# Altium PCB Battery Charger.PcbDoc
Units mil, origin at the board's own origin, x right, y up, seen from the top; angles counter-clockwise.
Board outline 6000 x 4000 mil, 4 copper layers (Top Layer, GND, Power Plane, Bottom Layer), stack 23.756 mil thick; 64 components, 24 nets, 160 pads, 52 vias.
Unrouted connection lines stored in the file: 2.
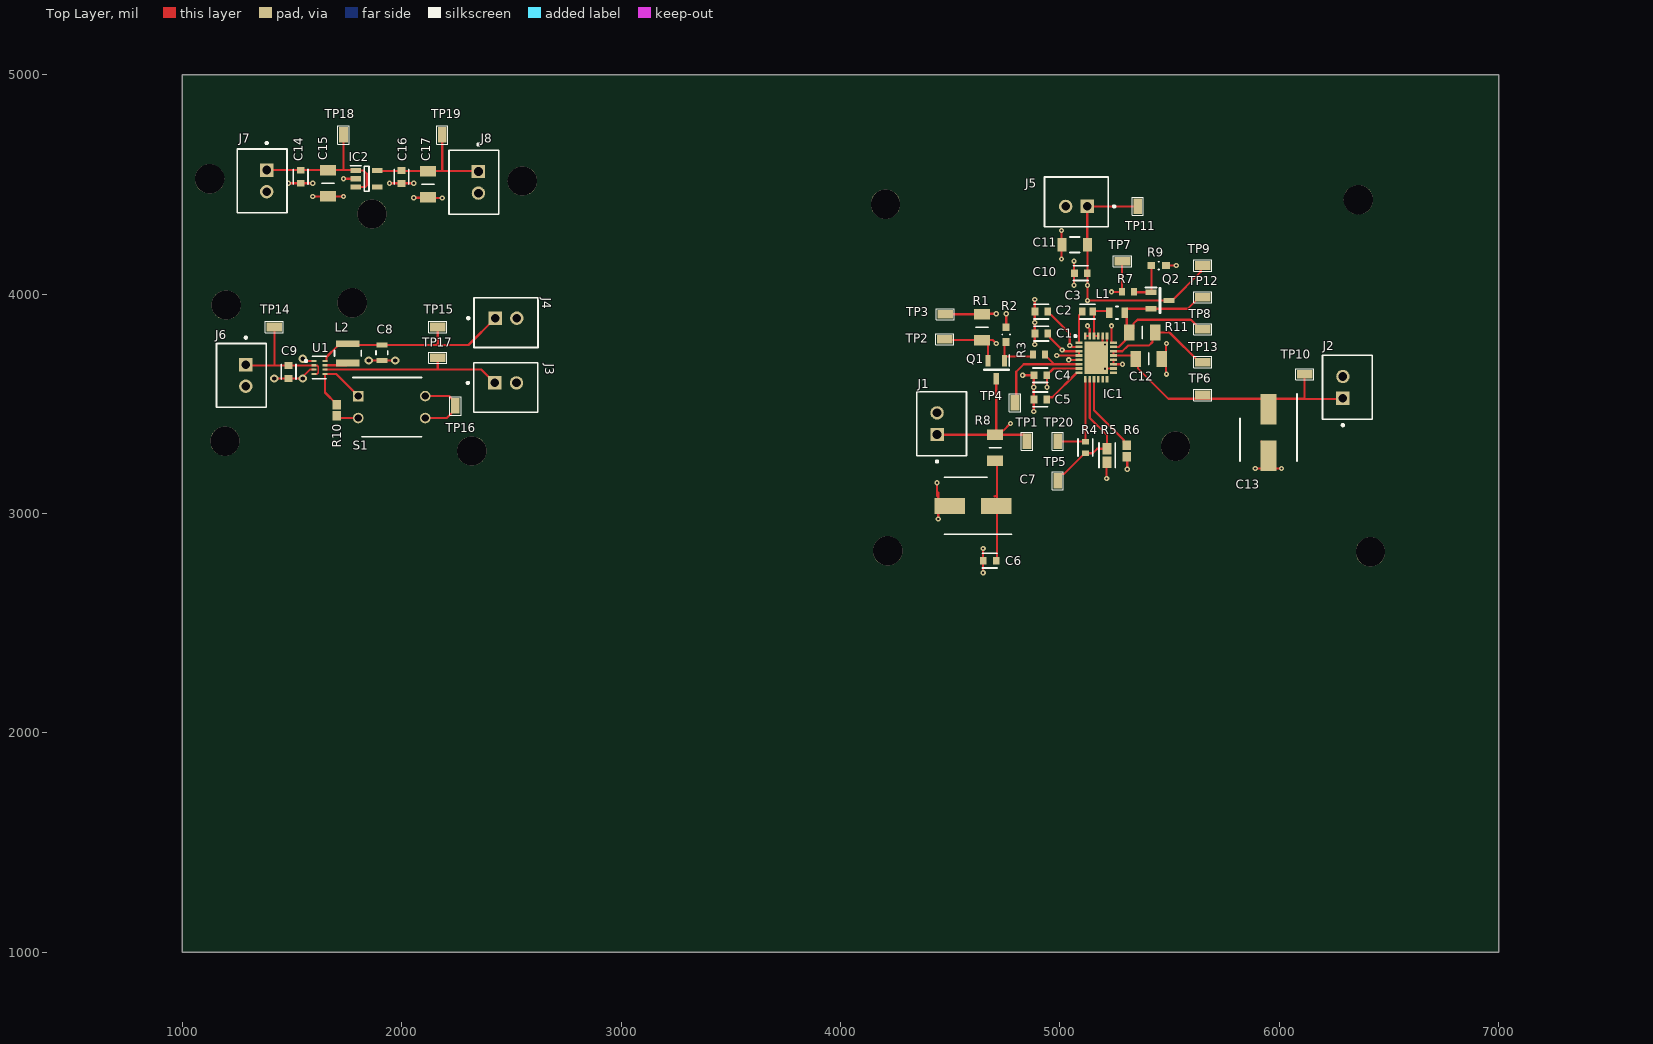
[diagram p0: Top Layer view]
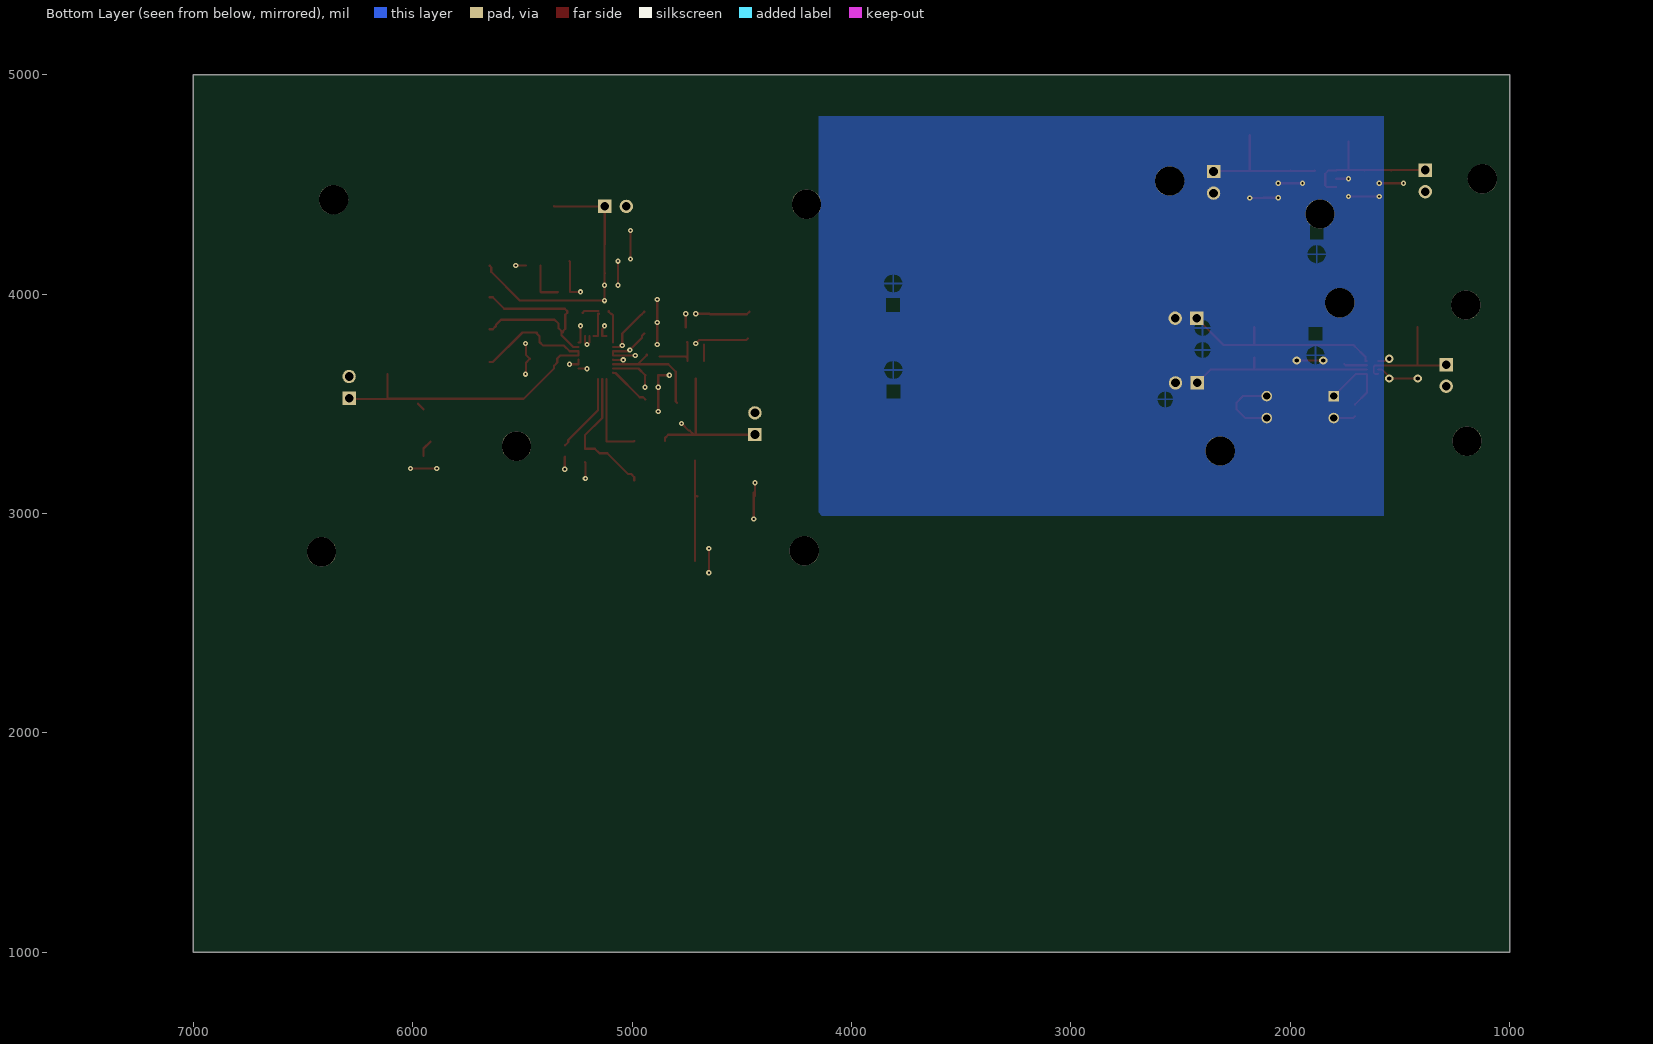
[diagram p1: Bottom Layer view, seen from below]
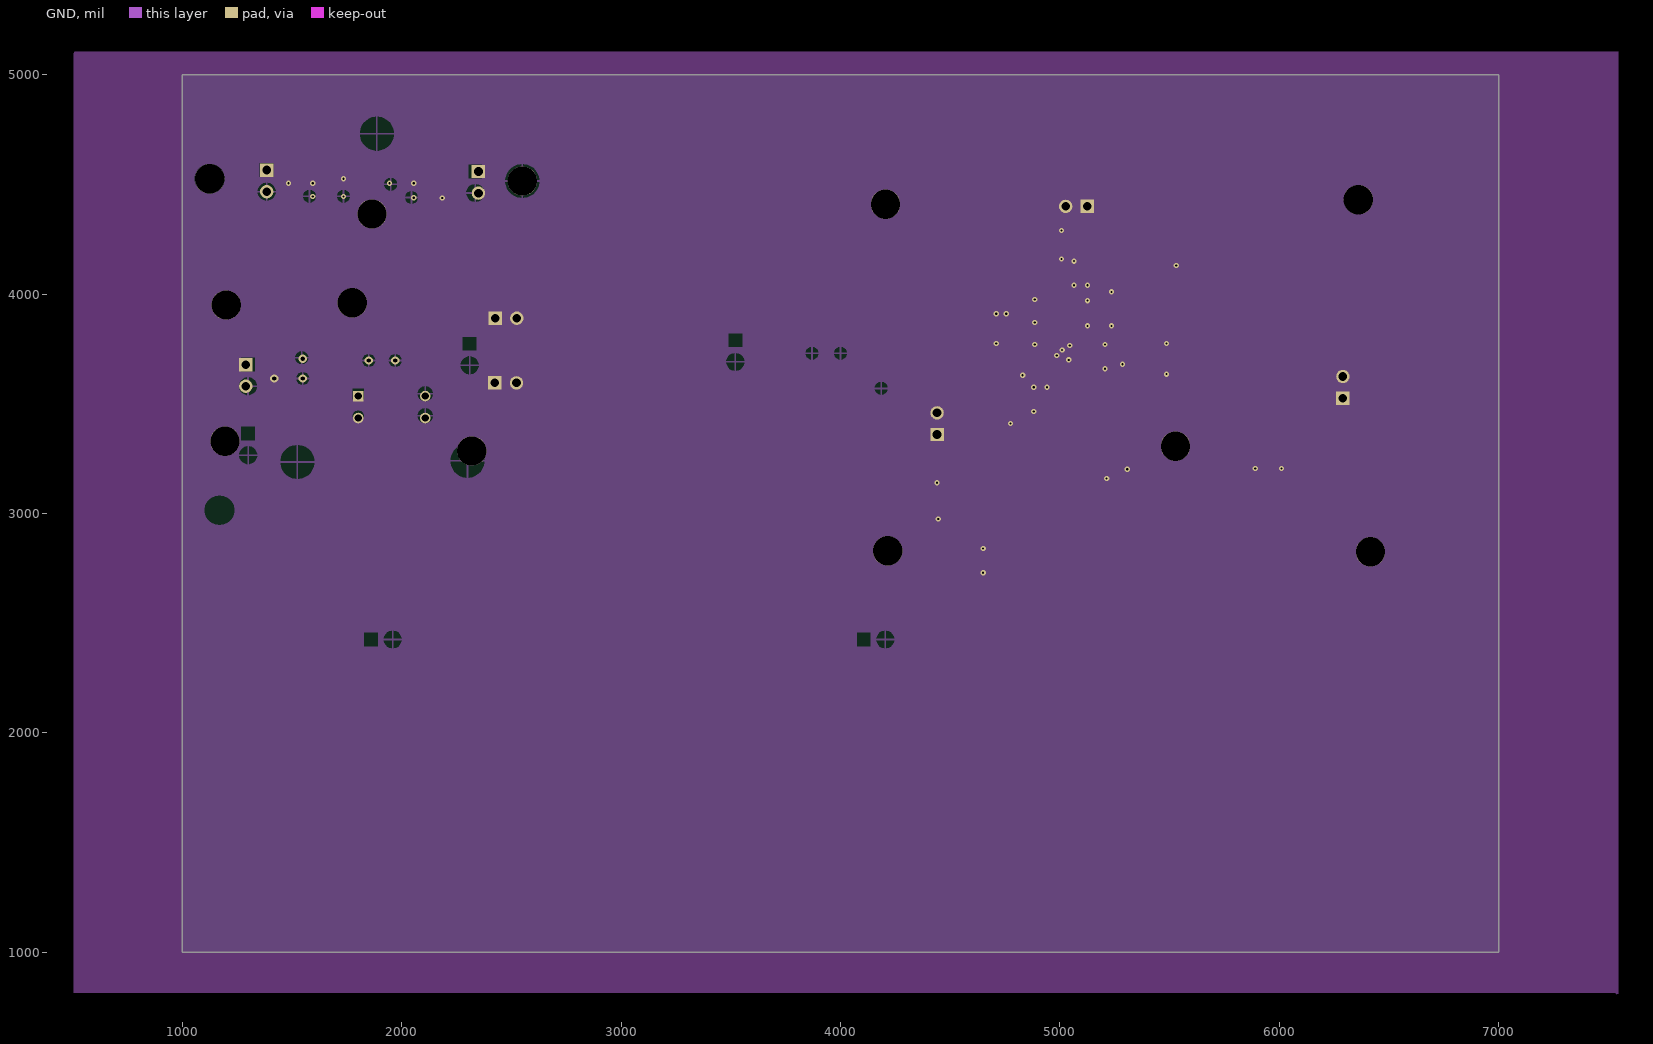
[diagram p2: GND]
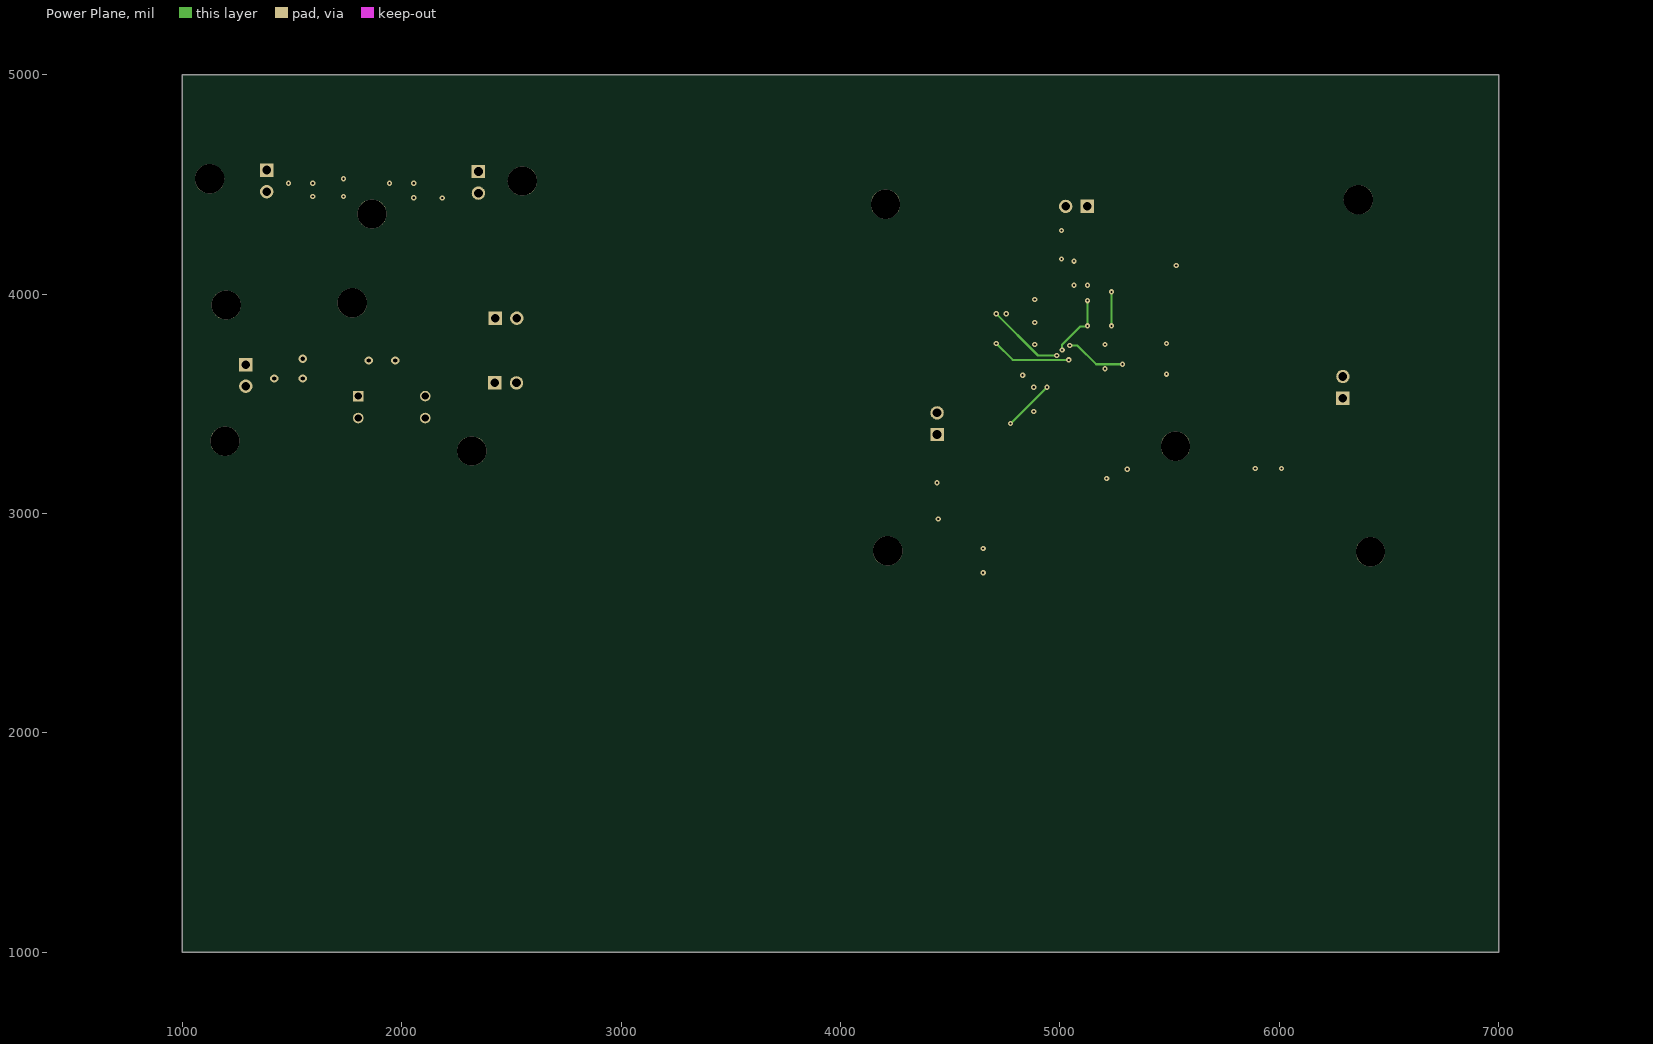
[diagram p3: Power Plane]
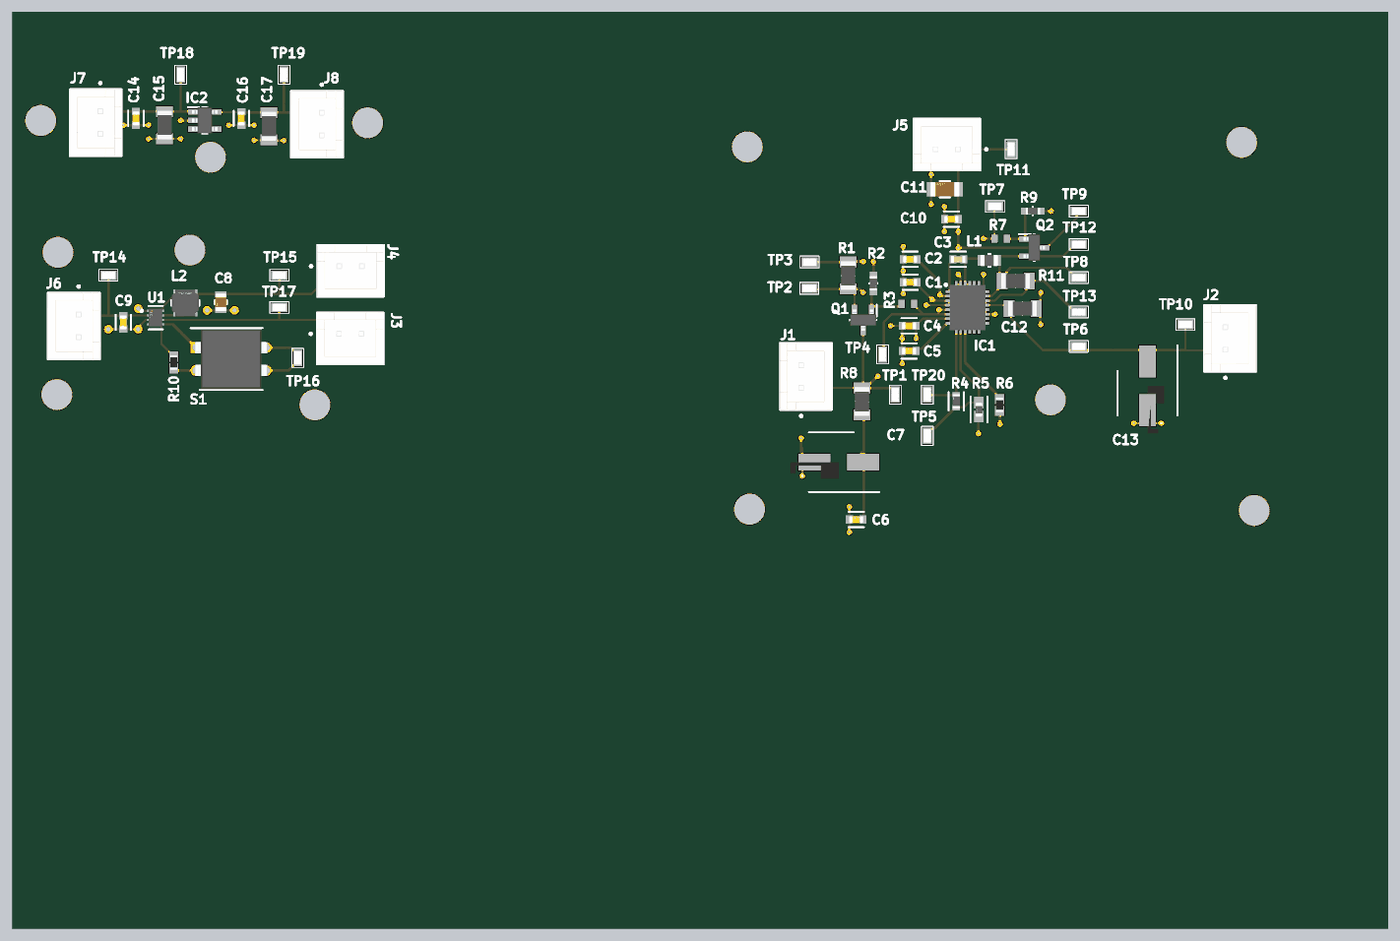
[diagram p4: 3D render of the assembled board from above, using the file's embedded part models]

## Layer stack, top to bottom
Top Solder: solder mask 0.4, Solder Resist, Dk 3.5
Top Layer: signal copper 1.4
Dielectric 2: prepreg 2.8, PP-006, Dk 4.1
GND: signal copper 1.378
Dielectric 1: dielectric 12.6, FR-4, Dk 4.8
Power Plane: signal copper 1.378
Dielectric 3: prepreg 2.8, PP-006, Dk 4.1
Bottom Layer: signal copper 1.4
Bottom Solder: solder mask 0.4, Solder Resist, Dk 3.5

## Board outline
1000,1000 7000,1000 7000,5000 1000,5000

## Design rules (kind name [scope] priority, off if disabled: settings)
Clearance [All] p1 off: gap=10 ignorepadtopadclearanceinfootprint=TRUE
PolygonConnect [All] p1: connectstyle=Relief reliefconductorwidth=10 reliefentries=4 polygonreliefangle="90 Angle" airgapwidth=10
RoutingVias [All] p1 off: holewidth=28 width=50 viastyle="Through Hole" minholewidth=28 minwidth=50 maxholewidth=28 maxwidth=50
SolderMaskExpansion [All] p1: expansion=4 istentingtop=FALSE
SupplyNets "Schematic Supply Nets" [InNet('GND')] p1: voltage=0.000
Width [All] p1: maxlimit=20 minlimit=9 preferedwidth=10 midlayer1_maxwidth=10 midlayer2_maxwidth=10 bottomlayer_maxwidth=10 minimp=50.000000 maximp=50.000000 favimp=50.000000
30 further rules are at their usual default settings.

## Classes and differential pairs
component class "Panel protection": C14 C15 C16 C17 IC2 J7 J8 TP18 TP19
component class "Step-Down Converter": C8 C9 J3 J4 J6 L2 R10 S1 TP14 TP15 TP16 TP17 U1
component class "Battery Charger": C1 C2 C3 C4 C5 C6 C7 C10 C11 C12 C13 IC1 J1 J2 J5 L1 Q1 Q2 R1 R2 R3 R4 R5 R6 R7 R8 R9 R11 TP1 TP2 TP3 TP4 TP5 TP6 TP7 TP8 TP9 TP10 TP11 TP12 TP13 TP20

## Components (designator, comment, footprint, x,y, rotation, side; value= is the part's Value field where it differs from the comment)
C1 "0.1µF" FP-CC0603-DA-MFG 4915,3820 r180 top value="100 nF"
C2 "4.7 µF" FP-CC0603-DA-MFG 4915,3920 r180 top value="4.7 uF"
C3 "0.022 µF" FP-C0603C-CF-MFG 5125,3920 r180 top value="22,000 pF"
C4 "0.1µF" FP-CC0603-DA-MFG 4910.47,3630 r180 top value="100 nF"
C5 "1µF" FP-CC0603-DA-MFG 4910.47,3520 r180 top value="1 uF"
C6 "0.1µF" FP-CC0603-DA-MFG 4680,2785 r180 top value="100 nF"
C7 "150µF" CAPAE660X730N 4603.7,3035 r180 top
C8 "10µF" FP-GRM21B-0_1-MFG 1910.27,3732.62 r270 top
C9 "4.7 µF" FP-CC0603-DA-MFG 1485,3645 r270 top value="4.7 uF"
C10 "0.1µF" FP-CC0603-DA-MFG 5095,4095 r180 top value="100 nF"
C11 "22uF" FP-GRM31C-0_2-e0_3_0_8-MFG 5066.93,4225 r180 top
C12 "10 µF" 1206 5405,3705 r0 top value="22,000 pF"
C13 "150µF" CAPAE660X730N 5950,3368.7 r270 top
C14 "0.33 µF" FP-CC0603-DA-MFG 1540,4534.53 r270 top value="330 nF"
C15 "10 µF" 1206 1665,4505 r270 top value="22,000 pF"
C16 "0.33 µF" FP-CC0603-DA-MFG 1999.45,4534.06 r270 top value="330 nF"
C17 "10 µF" 1206 2120,4500 r270 top value="22,000 pF"
IC1 "LTC4162EUFD-L42#PBF" QFN50P400X500X80-29N-D 5165,3710 r0 top
IC2 "MAX40200AUK+TCT" SOT95P280X145-5N 1840,4525 r0 top
J1 "B2B-XH-A(LF)(SN)" FP-B2B-XH-A_LF_SN-MFG 4460.67,3409.21 r90 top
J2 "B2B-XH-A(LF)(SN)" FP-B2B-XH-A_LF_SN-MFG 6310,3575 r90 top
J3 "B2B-XH-A(LF)(SN)" FP-B2B-XH-A_LF_SN-MFG 2474.21,3574.33 r0 top
J4 "B2B-XH-A(LF)(SN)" FP-B2B-XH-A_LF_SN-MFG 2475.79,3869.33 r0 top
J5 "B2B-XH-A(LF)(SN)" FP-B2B-XH-A_LF_SN-MFG 5075,4420 r180 top
J6 "B2B-XH-A(LF)(SN)" FP-B2B-XH-A_LF_SN-MFG 1269.33,3629.21 r270 top
J7 "B2B-XH-A(LF)(SN)" FP-B2B-XH-A_LF_SN-MFG 1364.33,4515.79 r270 top
J8 "B2B-XH-A(LF)(SN)" FP-B2B-XH-A_LF_SN-MFG 2329.33,4509.21 r270 top
L1 "MLZ2012M1R0HT000" FP-MLZ2012-1_25-MFG 5260,3915 r0 top
L2 "2.2uH" FP-NR3015-MFG 1755,3730 r90 top
Q1 "IRLML6344TRPBF" SOT95P237X112-3N 4710,3655 r270 top
Q2 "IRLML6344TRPBF" SOT95P237X112-3N 5456.01,3970.68 r0 top
R1 "60 mOhms" 1206 4645,3849.06 r90 top
R2 "100 kOhms" "RC0603FR-07100KL Resistor" 4755,3815 r270 top
R3 "10 Ohms" "RC0603FR-0710RL Resistor" 4905,3725 r180 top
R4 "10 kOhms" RC0603FR-0710KL 5115.79,3300.93 r90 top
R5 "10 kOhms" NCP18XH103F03RB 5215,3264.45 r270 top
R6 "63.4 kOhms" RESC1608X55N 5305,3285 r90 top
R7 "10 Ohms" "RC0603FR-0710RL Resistor" 5310,4010 r180 top
R8 "2.2 Ohms" 1206 4705,3300 r90 top
R9 "100 kOhms" "RC0603FR-07100KL Resistor" 5450,4130 r180 top
R10 "267kOhms" RESC1608X55N 1705,3470 r270 top
R11 "150 mOhms" 1206 5375,3825 r0 top
S1 "210-2MS" DIP775W63P254L655H458Q4N 1955,3485 r0 top
TP1 "S2761-46R" S276146R 4850,3330 r90 top
TP2 "S2761-46R" S276146R 4475.57,3793.52 r180 top
TP3 "S2761-46R" S276146R 4476.89,3908.11 r0 top
TP4 "S2761-46R" S276146R 4795,3505 r270 top
TP5 "S2761-46R" S276146R 4990,3150 r90 top
TP6 "S2761-46R" S276146R 5650,3540 r0 top
TP7 "S2761-46R" S276146R 5285,4150 r0 top
TP8 "S2761-46R" S276146R 5650,3840 r0 top
TP9 "S2761-46R" S276146R 5650,4130 r0 top
TP10 "S2761-46R" S276146R 6115,3635 r0 top
TP11 "S2761-46R" S276146R 5355,4400 r270 top
TP12 "S2761-46R" S276146R 5650,3985 r180 top
TP13 "S2761-46R" S276146R 5650,3690 r180 top
TP14 "S2761-46R" S276146R 1420,3850 r180 top
TP15 "S2761-46R" S276146R 2165,3850 r0 top
TP16 "S2761-46R" S276146R 2245,3490 r270 top
TP17 "S2761-46R" S276146R 2165,3710 r180 top
TP18 "S2761-46R" S276146R 1735,4725 r90 top
TP19 "S2761-46R" S276146R 2185,4725 r90 top
TP20 "S2761-46R" S276146R 4990,3330 r270 top
U1 "TPS62840DLCR" FP-DLC0008B-MFG 1625.59,3665.47 r0 top

## Footprints (in the part's own frame and the unit in brackets; to place one, negate y for a bottom-side part, rotate by r counter-clockwise, add the part's x,y. Pads: shape width x height; smd on the part's side, far side on the other; paste and mask are expansions set on the pad)
1206 [mm]
  rect 1.2x1.85 smd: 1(-1.5,0) 2(1.5,0)
  silkscreen extent 0,-0.7 0,0.7, body extent -1.6,-0.8 1.6,0.8, height 0.64
CAPAE660X730N [mm]
  rect 3.55x1.85 smd: 1(-2.7,0) 2(2.7,0)
  silkscreen extent -4.47,-3.3 3.3,3.3, body extent -0.35,-0.2 7.15,7.1
DIP775W63P254L655H458Q4N [mm]
  rect 1.23x1.23 hole 0.83: 1(-3.875,1.27)
  round 1.23 hole 0.83: 2(-3.875,-1.27) 3(3.875,-1.27) 4(3.875,1.27)
  silkscreen extent -4.49,-3.42 3.47,3.42, body extent -4.03,-3.27 4.03,3.27, height 4.58
FP-B2B-XH-A_LF_SN-MFG [mm]
  rect 1.55x1.55 hole 1 paste-2539.97 mask+0: 1(-1.25,0.525)
  round 1.55 hole 1 paste-2539.97 mask+0: 2(1.25,0.525)
  silkscreen extent -4.5,-2.88 3.7,2.88, body extent -3.8,-2.98 3.8,2.98, height 0.25
FP-C0603C-CF-MFG [mm]
  rect 0.75x0.9 smd paste+0 mask+0: 1(-0.6,0) 2(0.6,0)
  silkscreen extent -0.87,-0.85 0.88,0.85, body extent -1.2,-0.6 1.2,0.6, height 0.25
FP-CC0603-DA-MFG [mm]
  rect 0.8x0.9 smd paste+0 mask+0: 1(-0.75,0) 2(0.75,0)
  silkscreen extent -0.85,-0.85 0.85,0.85, body extent -1.35,-0.75 1.35,0.75, height 0.25
FP-DLC0008B-MFG [mm]
  rrect40% 0.6x0.25 smd paste+0 mask+0: 1(-0.65,0.75) 2(-0.65,0.25) 3(-0.65,-0.25) 4(-0.65,-0.75) 5(0.65,-0.75) 6(0.65,-0.25) 7(0.65,0.25) 8(0.65,0.75)
  silkscreen extent -1.67,-1.3 0.8,1.3, body extent -1.05,-1.15 1.05,1.15, height 0.25
FP-GRM21B-0_1-MFG [mm]
  rect 0.6x1.25 smd paste+0 mask+0: 1(-0.9,0) 2(0.9,0)
  silkscreen extent -0.23,-0.67 0.23,0.67, body extent -1.3,-0.77 1.3,0.77, height 0.25
FP-GRM31C-0_2-e0_3_0_8-MFG [mm]
  rect 1.05x1.6 smd paste+0 mask+0: 1(-1.475,0) 2(1.475,0)
  silkscreen extent -0.58,-0.9 0.58,0.9, body extent -2.1,-1 2.1,1, height 0.25
FP-MLZ2012-1_25-MFG [mm]
  rect 0.8x1.2 smd paste+0 mask+0: 1(-0.9,0) 2(0.9,0)
  silkscreen extent -0.13,-0.72 0.13,0.72, body extent -1.4,-0.82 1.4,0.82, height 0.25
FP-NR3015-MFG [mm]
  rect 0.8x2.7 smd paste+0 mask+0: 1(-1.1,0) 2(1.1,0)
  silkscreen extent -0.33,-1.55 0.33,1.55, body extent -1.65,-1.65 1.65,1.65, height 0.25
NCP18XH103F03RB [mil]
  rect 51.42x41.66 smd paste+0 mask+0: 1(-30.55,0) 2(30.55,0)
  silkscreen extent -56,-37 56,37, body extent -76,-41 76,41, height 10
QFN50P400X500X80-29N-D [mm]
  rect 0.8x0.3 smd: 1(-2,1.75) 2(-2,1.25) 3(-2,0.75) 4(-2,0.25) 5(-2,-0.25) 6(-2,-0.75) 7(-2,-1.25) 8(-2,-1.75) 15(2,-1.75) 16(2,-1.25) 17(2,-0.75) 18(2,-0.25) 19(2,0.25) 20(2,0.75) 21(2,1.25) 22(2,1.75)
  rect 0.3x0.8 smd: 9(-1.25,-2.5) 10(-0.75,-2.5) 11(-0.25,-2.5) 12(0.25,-2.5) 13(0.75,-2.5) 14(1.25,-2.5) 23(1.25,2.5) 24(0.75,2.5) 25(0.25,2.5) 26(-0.25,2.5) 27(-0.75,2.5) 28(-1.25,2.5)
  rect 2.75x3.75 smd: 29(0,0)
  silkscreen extent -2.52,2.38 -2.27,2.62, body extent -2.05,-2.55 2.05,2.55, height 0.8
RC0603FR-0710KL [mil]
  rect 25.93x31.97 smd paste+0 mask+0: 1(-26.64,0) 2(26.64,0)
  silkscreen extent -40,-33 40,33, body extent -44,-22 44,22, height 10
"RC0603FR-0710RL Resistor" [mm] "Chip Resistor, 2-Leads, Body 1.70x0.90mm, IPC Medium Density"
  rect 0.7x0.9 smd: 1(-0.7,0) 2(0.7,0)
  body extent -0.85,-0.45 0.85,0.45, height 0.55
"RC0603FR-07100KL Resistor" [mm]
  rect 0.9x0.8 smd paste+0 mask+0: 1(-0.85,0) 2(0.85,0)
  silkscreen extent -0.03,-0.45 0.03,0.45, body extent -1.4,-0.55 1.4,0.55, height 0.25
RESC1608X55N [mm]
  rect 1.1x1 smd: 1(-0.65,0) 2(0.65,0)
  body extent -0.8,-0.4 0.8,0.4, height 0.55
S276146R [mm]
  rect 1.8x1 smd: 1(0,0)
  silkscreen extent -1.05,-0.65 1.05,0.65, body extent -0.8,-0.4 0.8,0.4, height 1.18
SOT95P237X112-3N [mm]
  rect 1.3x0.6 smd: 1(-1.05,0.95) 2(-1.05,-0.95) 3(1.05,0)
  silkscreen extent -1.7,-1.46 0.05,1.5, body extent -1.18,-1.46 1.18,1.46, height 1.12
SOT95P280X145-5N [mm]
  rect 1.25x0.6 smd: 1(-1.25,0.95) 2(-1.25,0) 3(-1.25,-0.95) 4(1.25,-0.95) 5(1.25,0.95)
  silkscreen extent -1.88,-1.45 0.28,1.5, body extent -1.4,-1.45 1.4,1.45, height 1.45

## Part data
C1 C4 C6 C10: library part CMP-2000-05002-2, "CAP CER 0.1UF 16V X7R 0603 CC0603KRX7R7BB104", Capacitance="100 nF", Manufacturer=YAGEO, Manufacturer Part Number=CC0603KRX7R7BB104, Package=CC0603-DA, Temperature="-55°C to +125°C", Temperature Characteristic=X7R, Temperature Coefficient=15%, Temperature Range High=+125°C, Temperature Range Low=-55°C, Tolerance=0.1, Voltage="16 V", Automotive=No, Category=Cap, ComponentLink2Description=Datasheet, ComponentLink2URL=http://www.yageo.com/documents/recent/UPY-GPHC_X7R_6.3V-to-50V_18.pdf, Device Class L1="Passive Components", Device Class L2=Capacitors, Device Class L3="Ceramic Capacitors", Digikey Description="CAP CER 0.1UF 16V X7R 0603", Footprint Url=http://www.yageo.com/exep/pages/download/literatures/UPY-C_GEN_24.pdf, Height=0.9mm, Lead Free=Yes, Material=Ceramic, Mouser Description="Multilayer Ceramic Capacitor, CC Series, 0.1 - F, - 10%, X7R, 16 V, 0603 [1608 Metric]", Octopart=https://octopart.com/cc0603krx7r7bb104-yageo-192941, RoHS=TRUE, Voltage Rating="16 V"
C2 C9: library part CMP-2000-06074-2, "CAP CER 4.7UF 10V X5R 0603 CC0603KRX5R6BB475", Capacitance="4.7 uF", Manufacturer=YAGEO, Manufacturer Part Number=CC0603KRX5R6BB475, Package=CC0603-DA, Temperature="-55°C to +125°C", Temperature Characteristic=X5R, Temperature Coefficient=15%, Temperature Range High=+125°C, Temperature Range Low=-55°C, Tolerance=0.1, Voltage="10 V", Automotive=No, Category=Cap, ComponentLink2Description=Datasheet, ComponentLink2URL=http://www.yageo.com/documents/recent/UPY-GPHC_X7R_6.3V-to-50V_18.pdf, Device Class L1="Passive Components", Device Class L2=Capacitors, Device Class L3="Ceramic Capacitors", Digikey Description="CAP CER 4.7UF 10V X5R 0603", Footprint Url=http://www.yageo.com/exep/pages/download/literatures/UPY-C_GEN_24.pdf, Height=0.9mm, Lead Free=Yes, Material=Ceramic, Mouser Description="4.7µF Surface Mount, MLCC 0603 (1608 Metric) Package Ceramic Capacitors", Octopart=https://octopart.com/cc0603krx5r6bb475-yageo-9292507, RoHS=TRUE, Voltage Rating="10 V"
C3: library part CMP-2006-03139-2, "Ceramic Capacitor 0.022Uf 16V, X7R, 10%, 0603, Full Reel C0603C223K4RACTU", Capacitance="22,000 pF", Manufacturer=KEMET, Manufacturer Part Number=C0603C223K4RACTU, Package=C0603C-CF, Temperature="-55°C to +125°C", Temperature Characteristic=X7R, Temperature Coefficient=30ppm/°C, Temperature Range High=+125°C, Temperature Range Low=-55°C, Tolerance=0.1, Voltage Rating="16 V", Automotive=Yes, Automotive Grade="Grade 1", Category=Cap, ComponentLink2Description=Datasheet, ComponentLink2URL=https://api.kemet.com/component-edge/download/datasheet/C0603C100J5GACAUTO.pdf, Device Class L1="Passive Components", Device Class L2=Capacitors, Device Class L3="Ceramic Capacitors", Digikey Description="Ceramic Capacitor 0.022Uf 16V, X7R, 10%, 0603, Full Reel", Height=0.87mm, Lead Free=Yes, Material=Ceramic, Mouser Description="CAP CER 0.022UF 16V X7R 0603", Octopart=https://octopart.com/c0603c223k4ractu-kemet-123286, RoHS=TRUE
C5: library part CMP-03422-000612-1, "CAP CER 1UF 25V X5R 0603 CC0603KRX5R8BB105", Capacitance="1 uF", Manufacturer=YAGEO, Manufacturer Part Number=CC0603KRX5R8BB105, Package=CC0603-DA, Temperature="-55°C to +125°C", Temperature Characteristic=X5R, Temperature Coefficient=15%, Temperature Range High=+125°C, Temperature Range Low=-55°C, Tolerance=0.1, Voltage="25 V", Automotive=No, Category=Cap, ComponentLink2Description=Datasheet, ComponentLink2URL=http://www.yageo.com/documents/recent/UPY-GPHC_X7R_6.3V-to-50V_18.pdf, Device Class L1="Passive Components", Device Class L2=Capacitors, Device Class L3="Ceramic Capacitors", Digikey Description="CAP CER 1UF 25V X5R 0603", Footprint Url=http://www.yageo.com/exep/pages/download/literatures/UPY-C_GEN_24.pdf, Height=0.9mm, Lead Free=Yes, Material=Ceramic, Mouser Description="Multilayer Ceramic Capacitors MLCC - SMD/SMT 1.0uF 25V X5R 10%", Octopart=https://octopart.com/cc0603krx5r8bb105-yageo-9292811, RoHS=TRUE, Voltage Rating="25 V"
C7 C13: library part A765EG157M1CLAE027, "Capacitor Polarised A765EG157M1CLAE027", Manufacturer_Name=KEMET, Mouser Part Number=80-A765EG157M1CLAE27, Datasheet Link=https://content.kemet.com/datasheets/KEM_A4070_A765.pdf, Height=7.3mm, Manufacturer_Part_Number=A765EG157M1CLAE027, Mouser Price/Stock=https://www.mouser.co.uk/ProductDetail/KEMET/A765EG157M1CLAE027?qs=M6jHmRuQorWp0y%252BvvSOgjA%3D%3D
C8: library part CMP-2007-03534-2, "Chip Multilayer Ceramic Capacitors for General Purpose, 0805, 10uF, X5R, 15%, 10%, 16V GRM21BR61C106KE15K", Capacitance=10uF, Case Code (Imperial)=0805, Case Code (Metric)=2012, Dielectric=X5R, Max Operating Temperature=85°C, Min Operating Temperature=-55°C, Package Quantity=10000, Tolerance=10%, Voltage=16V, Case/Package=0805, Depth=1.25mm, Height=1.25mm, Length=2mm, Mount="Surface Mount", Packaging="Tape and Reel", Radiation Hardening=No, REACH SVHC="No SVHC", Termination=SMD/SMT, Thickness=0.053inch, Voltage Rating=16V, Voltage Rating (DC)=16V, Width=0.049inch
C11: library part CMP-06035-003841-1, "Chip Multilayer Ceramic Capacitors for General Purpose, 1206, 22uF, X7R, 15%, 10%, 10V GRM31CR71A226KE15L", Case Code (Imperial)=1206, Case Code (Metric)=3216, Dielectric=X7R, Max Operating Temperature=125°C, Min Operating Temperature=-55°C, Package Quantity=1, Tolerance=10%, Voltage=10V, Capacitance=22uF, Case/Package=1206, Depth=1.6mm, Height=1.6mm, Lead Free="Lead Free", Length=3.2mm, Material=Ceramic, Mount="Surface Mount", Packaging="Tape and Reel", Radiation Hardening=No, REACH SVHC="No SVHC", Termination=SMD/SMT, Thickness=0.071inch, Voltage Rating=10V, Voltage Rating (DC)=10V, Width=0.063inch
C12 C15 C17: library part CC1206KKX5R7BB106, "CC1206KKX5R7BB106 10 µF ±10% 16V Ceramic Capacitor X5R 1206 (3216 Metric)", Capacitance="22,000 pF", Manufacturer=KEMET, Manufacturer Part Number=C0603C223K4RACTU, Package=C0603C-CF, Temperature="-55°C to +125°C", Temperature Characteristic=X7R, Temperature Coefficient=30ppm/°C, Temperature Range High=+125°C, Temperature Range Low=-55°C, Tolerance=0.1, Voltage Rating="16 V", Automotive=Yes, Automotive Grade="Grade 1", Category=Cap, ComponentLink2Description=Datasheet, ComponentLink2URL=https://api.kemet.com/component-edge/download/datasheet/C0603C100J5GACAUTO.pdf, Device Class L1="Passive Components", Device Class L2=Capacitors, Device Class L3="Ceramic Capacitors", Digikey Description="Ceramic Capacitor 0.022Uf 16V, X7R, 10%, 0603, Full Reel", Height=0.87mm, Lead Free=Yes, Material=Ceramic, Mouser Description="CAP CER 0.022UF 16V X7R 0603", Octopart=https://octopart.com/c0603c223k4ractu-kemet-123286, RoHS=TRUE
C14 C16: library part CMP-03422-000838-1, "CAP CER 0.33UF 16V X7R 0603CC0603KRX7R7BB334", Capacitance="330 nF", Manufacturer=YAGEO, Manufacturer Part Number=CC0603KRX7R7BB334, Package=CC0603-DA, Temperature="-55°C to +125°C", Temperature Characteristic=X7R, Temperature Coefficient=15%, Temperature Range High=+125°C, Temperature Range Low=-55°C, Tolerance=0.1, Voltage="16 V", Automotive=No, Category=Cap, ComponentLink2Description=Datasheet, ComponentLink2URL=http://www.yageo.com/documents/recent/UPY-GPHC_X7R_6.3V-to-50V_18.pdf, Device Class L1="Passive Components", Device Class L2=Capacitors, Device Class L3="Ceramic Capacitors", Digikey Description="CAP CER 0.33UF 16V X7R 0603", Footprint Url=http://www.yageo.com/exep/pages/download/literatures/UPY-C_GEN_24.pdf, Height=0.9mm, Lead Free=Yes, Material=Ceramic, Mouser Description="Multilayer Ceramic Capacitors MLCC - SMD/SMT 330nF 16V X7R 10%", Octopart=https://octopart.com/cc0603krx7r7bb334-yageo-9291796, RoHS=TRUE, Voltage Rating="16 V"
IC1: "Integrated Circuit", Manufacturer_Name="Analog Devices", Mouser Part Number=584-4162EUFDL42PB, Arrow Part Number=LTC4162EUFD-L42#PBF, Arrow Price/Stock=https://www.arrow.com/en/products/ltc4162eufd-l42pbf/analog-devices?region=nac, Datasheet Link=https://www.analog.com/media/en/technical-documentation/data-sheets/LTC4162-L.pdf, Height=0.8mm, Manufacturer_Part_Number=LTC4162EUFD-L42#PBF, Mouser Price/Stock=https://www.mouser.co.uk/ProductDetail/Analog-Devices/LTC4162EUFD-L42PBF?qs=MLItCLRbWsz3JPFW5UIzwg%3D%3D
IC2: "Integrated Circuit", Manufacturer_Name="Analog Devices", Height=1.45mm, Manufacturer_Part_Number=MAX40200AUK+TCT
J1 J2 J3 J4 J5 J6 J7 J8: library part CMP-2000-05888-3, "CONN HEADER VERT 2POS 2.5MM", Color=Natural, Contact Resistance=20mR, Current Rating=3A, Housing Color=White, Insulation Resistance=1GR, Max Operating Temperature=85°C, Max Voltage Rating (AC)=250V, Min Operating Temperature=-25°C, Connector Type="Male Pin", Contact Material=Brass, Contact Plating=Tin, Contact Type="Male Pin", Depth=5.75mm, Fastening Type=Detent, Housing Material=Polyamide, Lead Free="Lead Free", Lead Pitch=2.5mm, Length=7.4mm, Max Current Rating=3A, Max Voltage Rating (DC)=250V, Mount="Through Hole", Number of Contacts=2, Number of Positions=2, Number of Rows=1, Orientation=Straight, Packaging=Bulk, Pitch=2.5mm, REACH SVHC="No SVHC", Series=XH, Termination=Solder, Voltage Rating=250V, Voltage Rating (AC)=250V, Wire/Cable Gauge=22AWG
L1: library part CMP-08253-000136-1, "Shielded Multilayer Inductor 1uH ±20% 800mA 130mΩ SMD 0805", Case Code (Imperial)=0805, Case Code (Metric)=2012, Current Rating=800mA, DC Resistance (DCR)=130mR, Inductance=1uH, Max Operating Temperature=125°C, Min Operating Temperature=-55°C, Package Quantity=2000, Saturation Current=700mA, Self Resonant Frequency=150MHz, Test Frequency=2MHz, Tolerance=20%, Case/Package=0805, Core Material=Ferrite, Height - Seated (Max)=0.057inch, Lead Free="Lead Free", Length=0.079inch, Mount="Surface Mount", Packaging="Tape and Reel", RoHS Compliant=Yes, Shielding=Shielded, Width=0.049inch
L2: library part CMP-0569-00001-3, "SMD Power Inductors 2.2uH ±20% 1.48A 72mΩ NR3015T2R2M", Case/Package=3015, Current Rating=1.48A, DC Resistance (DCR)=72mR, Inductance Tolerance=20%, Max DC Current=1.5A, Max Operating Temperature=120°C, Min Operating Temperature=-25°C, Package Quantity=1, Resistor Type=Wirewound, Self Resonant Frequency=64MHz, Test Frequency=100kHz, Core Material=Ferrite, Halogen Free="Halogen Free", Height=1.5mm, Height - Seated (Max)=0.059inch, Inductance=2.2uH, Lead Free="Lead Free", Length=0.118inch, Number of Pins=2, Packaging="Tape and Reel", RMS Current (Irms)=1.5A, RoHS Compliant=Yes, Saturation Current=1.48A, Series=NR, Shielding=Shielded, Termination=SMD/SMT, Tolerance=20%, Width=0.118inch
Q1 Q2: "MOSFET (N-Channel)", Manufacturer_Name=Infineon, Mouser Part Number=942-IRLML6344TRPBF, Arrow Part Number=IRLML6344TRPBF, Arrow Price/Stock=https://www.arrow.com/en/products/irlml6344trpbf/infineon-technologies-ag?utm_currency=USD&region=nac, Datasheet Link=https://www.infineon.com/dgdl/irlml6344pbf.pdf?fileId=5546d462533600a4015356689c44262c, Height=1.12mm, Manufacturer_Part_Number=IRLML6344TRPBF, Mouser Price/Stock=https://www.mouser.co.uk/ProductDetail/Infineon-Technologies/IRLML6344TRPBF?qs=9%252BKlkBgLFf2w4qS48UOXVw%3D%3D
R1: library part "PE1206FRM070R06L Resistor", "PE1206FRM070R06L 60 mOhms ±1% 0.25W, 1/4W Chip Resistor 1206 (3216 Metric) Automotive AEC-Q200, Current Sense Metal Film"
R2 R9: library part "RC0603FR-07100KL Resistor", "100 kOhms ±1% 0.1W, 1/10W Chip Resistor 0603 (1608 Metric) Moisture Resistant Thick Film"
R3 R7: library part "RC0603FR-0710RL Resistor", "10 Ohms ±1% 0.1W, 1/10W Chip Resistor 0603 (1608 Metric) Moisture Resistant Thick Film"
R4: library part "RC0603FR-0710KL Resistor", "10 kOhms ±1% 0.1W, 1/10W Chip Resistor 0603 (1608 Metric) Moisture Resistant Thick Film"
R5: library part "NCP18XH103F03RB Resistor", "THERMISTOR NTC 10KOHM 3380K 0603"
R6: library part RC0603FR-0763K4L, "RC0603FR-0763K4L", Manufacturer_Name=KEMET, Mouser Part Number=603-RC0603FR-0763K4L, Arrow Part Number=RC0603FR-0763K4L, Arrow Price/Stock=https://www.arrow.com/en/products/rc0603fr-0763k4l/yageo, Datasheet Link=http://www.yageo.com/documents/recent/PYu-RC0603_51_RoHS_L_v5.pdf, Height=0.55mm, Manufacturer_Part_Number=RC0603FR-0763K4L, Mouser Price/Stock=https://www.mouser.co.uk/ProductDetail/Yageo/RC0603FR-0763K4L?qs=bK2T7AVO1ye5WfXmb5QR%252Bw%3D%3D
R8: library part "SR1206FR-7T2R2L Resistor", "SR1206FR-7T2R2L 2.2 Ohms ±1% 0.75W, 3/4W Chip Resistor 1206 (3216 Metric) Automotive AEC-Q200, Pulse Withstanding Thick Film"
R10: library part RC0603FR-07267KL, "Resistor", Manufacturer_Name=KEMET, Datasheet Link=http://www.yageo.com/documents/recent/PYu-RC0603_51_RoHS_L_v5.pdf, Height=0.55mm, Manufacturer_Part_Number=RC0603FR-07267KL
R11: library part "WSL1206R1500FEA Resistor", "WSL1206R1500FEA 150 mOhms ±1% 0.25W, 1/4W Chip Resistor 1206 (3216 Metric) Anti-Sulfur, Automotive AEC-Q200, Current Sense, Moisture Resistant, Pulse Withstanding Metal Element"
S1: "Switch", Manufacturer_Name=CTS, Mouser Part Number=774-2102MS, Arrow Part Number=210-2MS, Arrow Price/Stock=https://www.arrow.com/en/products/210-2ms/cts, Datasheet Link=https://componentsearchengine.com/Datasheets/1/210-2MS.pdf, Height=4.58mm, Manufacturer_Part_Number=210-2MS, Mouser Price/Stock=https://www.mouser.co.uk/ProductDetail/CTS-Electronic-Components/210-2MS?qs=hDoPxpGr7ldHQa2fpEXONg%3D%3D
TP1 TP2 TP3 TP4 TP5 TP6 TP7 TP8 TP9 TP10 TP11 TP12 TP13 TP14 TP15 TP16 TP17 TP18 TP19 TP20: "Test Point", Manufacturer_Name=Harwin, Mouser Part Number=855-S2761-46R, Datasheet Link=https://www.mouser.fr/ProductDetail/Harwin/S2761-46R?qs=DaxoyN%2FvrebHvZaagZ7Fog%3D%3D, Height=1.15mm, Manufacturer_Part_Number=S2761-46R, Mouser Price/Stock=https://www.mouser.co.uk/ProductDetail/Harwin/S2761-46R?qs=DaxoyN%2FvrebHvZaagZ7Fog%3D%3D
U1: library part CMP-04918-000086-1, "ULTRA LOW IQ BUCK CONVERTER", Manufacturer="Texas Instruments", Max Junction Temp=+125°C, Max Supply Voltage=6.5V, Min Supply Voltage=1.8V, Nominal Supply Current=0.005-3000uA, Output Current=750mA, Output Voltage=1.8-3.3V, Package=DLC0008B, Switching Frequency=1.8MHz, Temperature="-40°C to +125°C", Temperature Range Low=-40°C, Automotive=No, Category=IC, ComponentLink2Description=Datasheet, ComponentLink2URL=http://www.ti.com/lit/ds/symlink/tps62840.pdf, Device Class L1="Integrated Circuits (ICs)", Device Class L2="Power Management ICs", Device Class L3="Voltage Regulators - Switching", Digikey Description="ULTRA LOW IQ BUCK CONVERTER", Height=1mm, Ipc Land Pattern Name=DFN200X150X100-8, Lead Free=Yes, Manufacturer Part Number=TPS62840DLCR, Max Duty Cycle=100%, Mouser Description="60-nA IQ, 1.8-V to 6.5-VIN, high-efficiency 750-mA step-down converter 8-VSON-HR -40 to 125", Number Of Outputs=1, Octopart=https://octopart.com/tps62840dlcr-texas+instruments-103121111, Output Type=AdjustableProgrammable, RoHS=TRUE, Standoff Height=0mm, Switching Topology=Buck, Temperature Range High=+125°C

## Free pads (board coordinates)
  round 133.86 hole 133.86: MH(1125,4525) MH(1195,3330) MH(1200,3950) MH(1775,3960) MH(1865,4365) MH(2320,3285) MH(2550,4515) MH(4205,4410) MH(4215,2830) MH(5526.53,3306.94) MH(6360,4430) MH(6415,2825)

## Via types
v1: diameter 24, hole 10, Top Layer to Bottom Layer, 47 vias
v2: diameter 38, hole 20, Top Layer to Bottom Layer, 5 vias

## Nets (pads, with @x,y where several pads share a name; then routed paths per layer and width w, separated by ;. In a path a pad name is that pad's centre, name@x,y a point inside that pad or via, vN(x,y) a via of type N, cw(c..) or ccw(c..) an arc to the next point about the centre after c; other vN are vias at no path point)
BATT_P+: C12.1 C13.1 IC1.19 IC1.20 J2.1 R11.2 TP6.1 TP10.1 TP13.1 | length 1833
  Top Layer w10: R11.2 5499.25,3825 5634.25,3690 TP13.1 ; R11.2@5439.06,3825 5421.4,3807.35 5421.4,3781.4 5405,3765 5310,3765 5284.53,3739.53 IC1.20 IC1.19 5327.32,3719.86 5340.94,3706.24 5340.94,3687.8 5355,3673.74 5355,3662.2 5494.04,3523.17 6115,3523.17 ; C13.1 C13.1@5976.06,3501.06 ; TP10.1 6115,3522.36 6285.9,3522.36 J2.1
GND: C1.2 C2.2 C4.2 C5.2 C6.2 C7.2 C8.2 C9.2 C10.2 C11.2 C12.2 C13.2 C14.2 C15.2 C16.2 C17.2 IC1.16 IC1.23 IC1.24 IC1.29 IC2.2 J1.2 J2.2 J3.2 J4.2 J5.2 J6.2 J7.2 J8.2 pad.MH@1200,3950 pad.MH@1775,3960 pad.MH@1865,4365 pad.MH@2320,3285 pad.MH@2550,4515 pad.MH@4205,4410 pad.MH@4215,2830 pad.MH@5526.53,3306.94 pad.MH@6360,4430 pad.MH@6415,2825 R2.1 R5.2 R6.1 R9.1 S1.3 S1.4 TP16.1 U1.1 U1.3 | length 2969.3
  Top Layer w9: v2(1550,3615) 1555.55,3620.55 1555.55,3629.53 1581.64,3655.63 U1.3 ; v2(1550,3705) 1557.85,3705 1567.85,3695 U1.1
  Top Layer w10: v2(1420,3615) v2(1550,3615) ; v1(1485,4505) C14.2 v1(1595,4505) ; v1(1595,4445) 1664.06,4445 C15.2 1665.94,4445 v1(1735,4445) ; v1(1735,4525) IC2.2 ; v2(1850.27,3697.19) C8.2 v2(1970.27,3697.19) ; v1(1945,4505) C16.2@1999.92,4505 ; C16.2 C16.2@1999.92,4505 ; v1@2052.85,4438.85 v1(2055,4438.85) 2117.9,4438.85 C17.2@2119.53,4440.47 ; v1(2055,4505) C16.2@1999.92,4505 ; S1.3 2205.75,3435 2245,3474.25 TP16.1 2245,3505.75 2215.75,3535 S1.4 ; C17.2 2123.13,4437.81 v1(2185,4437.81) ; 4440,3080 v1(4440,3140) ; v1(4445,2975) 4445,3035 4445,3095 ; v1(4650,2730) 4650,2785 v1(4650,2840) ; R2.1 v1(4755,3910) ; v1(4830,3630) 4880.47,3630 v1(4880.47,3575) 4880.47,3520.47 C5.2 4880.47,3519.53 v1(4880.47,3465) ; v1(4885,3770) 4885,3819.53 C1.2 4885,3820.47 v1(4885,3870) C2.2@4885,3920 ; C2.2 v1@4885.47,3974.53 ; v1(5006.93,4160) 5006.93,4225 v1(5006.93,4290) ; v1(5064.53,4040) 5064.53,4095 v1(5064.53,4150) ; IC1.24 5194.53,3778.82 5203.35,3770 v1(5205,3770) ; v1(5205,3660) 5205.79,3660.79 IC1.16 ; IC1.29@5205.31,3770 5214.13,3778.82 5214.13,3808.35 IC1.23 ; v1(5212.71,3159.88) 5212.71,3231.6 R5.2 ; R6.1 5306.52,3257.89 v1(5306.52,3201.52) ; R9.1 v1(5530,4130) ; v1(5485,3635) 5482.68,3637.32 5482.68,3688.27 5465.94,3705 5482.68,3721.73 5482.68,3772.68 v1(5485,3775) ; v1(5890,3205) 5950,3205 v1(6010,3205) ; C13.2@5918.58,3327.28 5950,3295.87 C13.2 ; J2.2@6285.83,3627.72 J2.2
  Top Layer w20: J6.2 J6.2@1301.1,3580 ; J7.2 J7.2@1393.73,4466.57 ; v1@1734.53,4445.47 v1(1735,4445) ; J8.2@2338.9,4460 J8.2
  other v1: 4885,3975
INTVCC: C2.1 IC1.2 IC1.17 IC1.18 | length 573.2
  Top Layer w10: C2.1 4944.53,3918.03 C2.1@4955.28,3907.28 ; 4960.3,3904.7 5045,3820 v1(5045,3765) 5048.79,3765 5054.58,3759.21 IC1.2 ; IC1.18@5244.65,3699.25 IC1.18 IC1.17 5243.98,3680.24 5284.76,3680.24 v1(5285,3680)
  Power Plane w10: v1(5045,3765) 5080,3765 5165,3680 v1(5285,3680)
NetC3_1: C3.1 IC1.25 IC1.26 L1.1 | length 200.6
  Top Layer w10: C3.1@5150,3910 5154.81,3910 5155.16,3909.65 IC1.26 IC1.25 ; C3.1@5153.19,3922.37 5217.2,3922.37 L1.1
NetC3_2: C3.2 IC1.1 | length 153.4
  Top Layer w10: IC1.1 5086.26,3902.68 5093.23,3909.65 5096.18,3909.65 5105.94,3919.42 C3.2@5105.94,3922.37
NetC4_1: C4.1 IC1.7 J1.1 Q1.3 R8.2 TP1.1 | length 1214.4
  Top Layer w10: J1.1 4440.75,3359.25 R8.2@4702.23,3359.25 ; Q1.3 4710,3364.06 R8.2 4710,3359.06 4722.33,3359.06 4722.33,3363.59 4736.42,3377.68 4740.95,3377.68 4773.27,3410 v1(4775,3410) ; R8.2@4717.8,3359.06 4835.31,3359.06 4850,3344.37 TP1.1 ; v1(4941.16,3575.43) 4941.16,3628.84 C4.1 4970.79,3660.79 IC1.7
  Power Plane w10: v1(4775,3410) 4775.36,3410 4940.8,3575.43 v1(4941.16,3575.43)
NetC5_1: C5.1 IC1.8 | length 196.4
  Top Layer w10: C5.1 4949.58,3529.58 4964.89,3529.58 5075.51,3640.2 5085.35,3640.2 IC1.8
NetC6_1: C6.1 C7.1 R8.1 | length 460.1
  Top Layer w10: 4702.03,3077.03 4705,3080 ; C6.1@4712.97,2785 4712.97,3035 R8.1@4712.97,3240.94
NetC9_1: C9.1 J6.1 TP14.1 U1.2 U1.4 | length 560.1
  Top Layer w9: C9.1 1485.79,3675.31 U1.2 1600.42,3674.89 1614.73,3674.89 1620,3669.62 1620,3641.64 1614.73,3636.37 1600.42,3636.37 U1.4
  Top Layer w10: J6.1 1293.9,3674.53 1420,3674.53 ; TP14.1 1420,3674.53 ; C9.1 1420,3674.53
NetC14_1: C14.1 C15.1 IC2.1 IC2.3 J7.1 TP18.1 | length 696.6
  Top Layer w10: J7.1 1539.06,4565 C14.1 1540.94,4565 1658.58,4565 C15.1@1659.76,4563.82 ; C15.1 1665.94,4565 1735,4565 ; TP18.1@1735,4695 1735,4565 ; IC2.3 1790.84,4487.66 1833.87,4487.66 1841.21,4495 1841.21,4548.79 1827.6,4562.4 IC2.1 1788.19,4565 1735,4565
NetIC1_5: IC1.5 Q1.2 R1.1 TP2.1 | length 728.3
  Top Layer w10: TP2.1@4472.05,3797.05 4479.09,3790 4695,3790 v1(4710,3775) ; Q1.2 R1.1@4672.6,3770.2 ; v1(5040,3700) 5040.08,3700.08 5086.18,3700.08 IC1.5
  Power Plane w10: v1(4710,3775) 4785,3700 v1(5040,3700)
NetIC1_6: IC1.6 R3.1 TP4.1 | length 504.7
  Top Layer w10: TP4.1 4801,3511 4801,3646 4835.24,3680.24 4973.39,3680.24 ; R3.1 4932.56,3721.06 4973.39,3680.24 ; IC1.6 5086.02,3680.24 4973.39,3680.24
NetIC1_9: IC1.9 R4.2 TP20.1 | length 410.8
  Top Layer w10: TP20.1 4992.43,3327.57 R4.2 IC1.9
NetIC1_10: IC1.10 R4.1 R5.1 TP5.1 | length 643.8
  Top Layer w10: TP5.1 4990,3165.75 5004.69,3180.43 5018.91,3180.43 5112.77,3274.29 R4.1 5148.63,3274.29 5169.34,3295 R5.1 5215,3355.99 5135.47,3435.52 IC1.10
NetIC1_11: IC1.11 R6.2 | length 363.1
  Top Layer w10: IC1.11 5155.16,3469.84 5290.31,3334.69 5290.31,3325.28 R6.2
NetIC1_21: IC1.21 L1.2 Q2.2 R11.1 TP8.1 TP12.1 | length 987.7
  Top Layer w10: IC1.21 5269.21,3759.21 5320.94,3810.94 R11.1@5320.94,3825 ; R11.1 5334.57,3843.62 5334.57,3864.57 5353.15,3883.15 5596.85,3883.15 5619.57,3860.43 5619.57,3854.69 5634.25,3840 TP8.1 ; R11.1@5317.07,3828.62 5304.27,3841.42 5304.27,3906.16 L1.2 5295.43,3922.54 5306.18,3933.28 Q2.2 5582.54,3933.28 5634.25,3985 TP12.1
NetIC1_22: IC1.22 R7.2 TP7.1 | length 427.8
  Top Layer w10: v1(5235,3855) 5235,3779.8 5235.91,3778.9 IC1.22 ; v1(5235,4010) R7.2 5282.44,4147.44 TP7.1
  Power Plane w10: v1(5235,3855) v1(5235,4010)
NetL2_1: L2.1 U1.7 | length 106.5
  Top Layer w10: U1.7 1748.62,3675.31 L2.1@1755,3681.69
NetQ1_1: Q1.1 R2.2 R3.2 | length 216.7
  Top Layer w10: Q1.1 4747.4,3700 Q1.1@4747.4,3708.19 ; R2.2@4750,3781.54 4747.4,3778.94 Q1.1@4747.4,3708.19 ; R3.2@4875,3715 4754.21,3715 Q1.1@4747.4,3708.19
NetQ2_1: Q2.1 R7.1 R9.2 | length 200.6
  Top Layer w10: R7.1 5339.47,4008.09 Q2.1 5416.54,4009.95 R9.2
NetR10_1: R10.1 S1.1 U1.5 | length 355.7
  Top Layer w10: R10.1 1705,3497.56 1651.18,3551.38 U1.5 1701.5,3635.94 S1.1
NetR10_2: R10.2 S1.2 | length 101.3
  Top Layer w10: R10.2 1714.41,3435 S1.2
STOP: J3.1 TP17.1 U1.6 | length 853.3
  Top Layer w10: U1.6 2165,3655.63 ; TP17.1 2165,3655.63 ; J3.1 2364.37,3655.63 2165,3655.63
VOUT: C1.1 C8.1 C10.1 C11.1 C16.1 C17.1 IC1.3 IC1.4 IC1.27 IC1.28 IC2.5 J4.1 J5.1 J8.1 L2.2 Q2.3 R1.2 TP3.1 TP9.1 TP11.1 TP15.1 TP19.1 U1.8 | length 4110.2
  Top Layer w10: U1.8 1657.91,3695 1657.99,3695.08 1657.99,3712.99 1706.85,3761.85 1706.85,3762.56 1712.34,3768.05 C8.1 2165,3768.05 ; IC2.5 1890.47,4561.15 1997.01,4561.15 C16.1 2002.33,4560.7 2118.35,4560.7 C17.1 2121.65,4560.7 2184.83,4560.7 ; TP15.1 2165,3768.05 ; TP19.1 2184.83,4724.83 2184.83,4560.7 ; J8.1 2347.72,4560.7 2184.83,4560.7 ; J4.1 2304.63,3768.05 2165,3768.05 ; TP3.1@4465,3920 TP3.1 R1.2 4646.89,3910 v1(4710,3910) ; C1.1 4955.28,3809.25 4955.28,3799.72 v1(5010,3745) 5013.79,3745 5019.26,3739.53 IC1.3 IC1.4 5086.18,3719.92 4985.08,3719.92 v1(4985,3720) ; IC1.28 IC1.27 5135.47,3840.74 5125,3851.21 v1(5125,3855) ; TP11.1 5354.33,4399.33 J5.1 5124.21,4225.79 C11.1 5125,4095.47 C10.1 5125,4094.53 v1(5125,4040) v1(5125,3970) Q2.3@5497.35,3970 ; Q2.3 5511.13,3970.68 5641.62,4101.17 5641.62,4121.62 TP9.1
  Power Plane w10: v1(4710,3910) 4900,3720 v1(4985,3720) ; v1(5010,3745) 5010,3770 5092.32,3852.32 5122.32,3852.32 v1(5125,3855) v1(5125,3970)
pads on no net: IC1.12 IC1.13 IC1.14 IC1.15 IC2.4

## Polygon pours and split planes (outlines as drawn)
GND on Bottom Layer "GND_L04_P000" (solid, remove dead copper, pour order 0): 1575,4810 4150,4810 4150,3005 4135,2990 1575,2990
GND on GND "GND_L02_P003" (solid, pour order 3): 505,5110 510,5105 7545,5105 7545,800 7530,815 505,815 505,5105 500,5110